# Altium PCB board.PcbDoc (part 1 of 2)
Units mm, origin at the board's own origin, x right, y up, seen from the top; angles counter-clockwise.
Board outline 96 x 40 mm, 4 copper layers (Top Layer, Mid Layer 1, Mid Layer 2, Bottom Layer), stack 1.57 mm thick; 216 components, 116 nets, 657 pads, 150 vias.
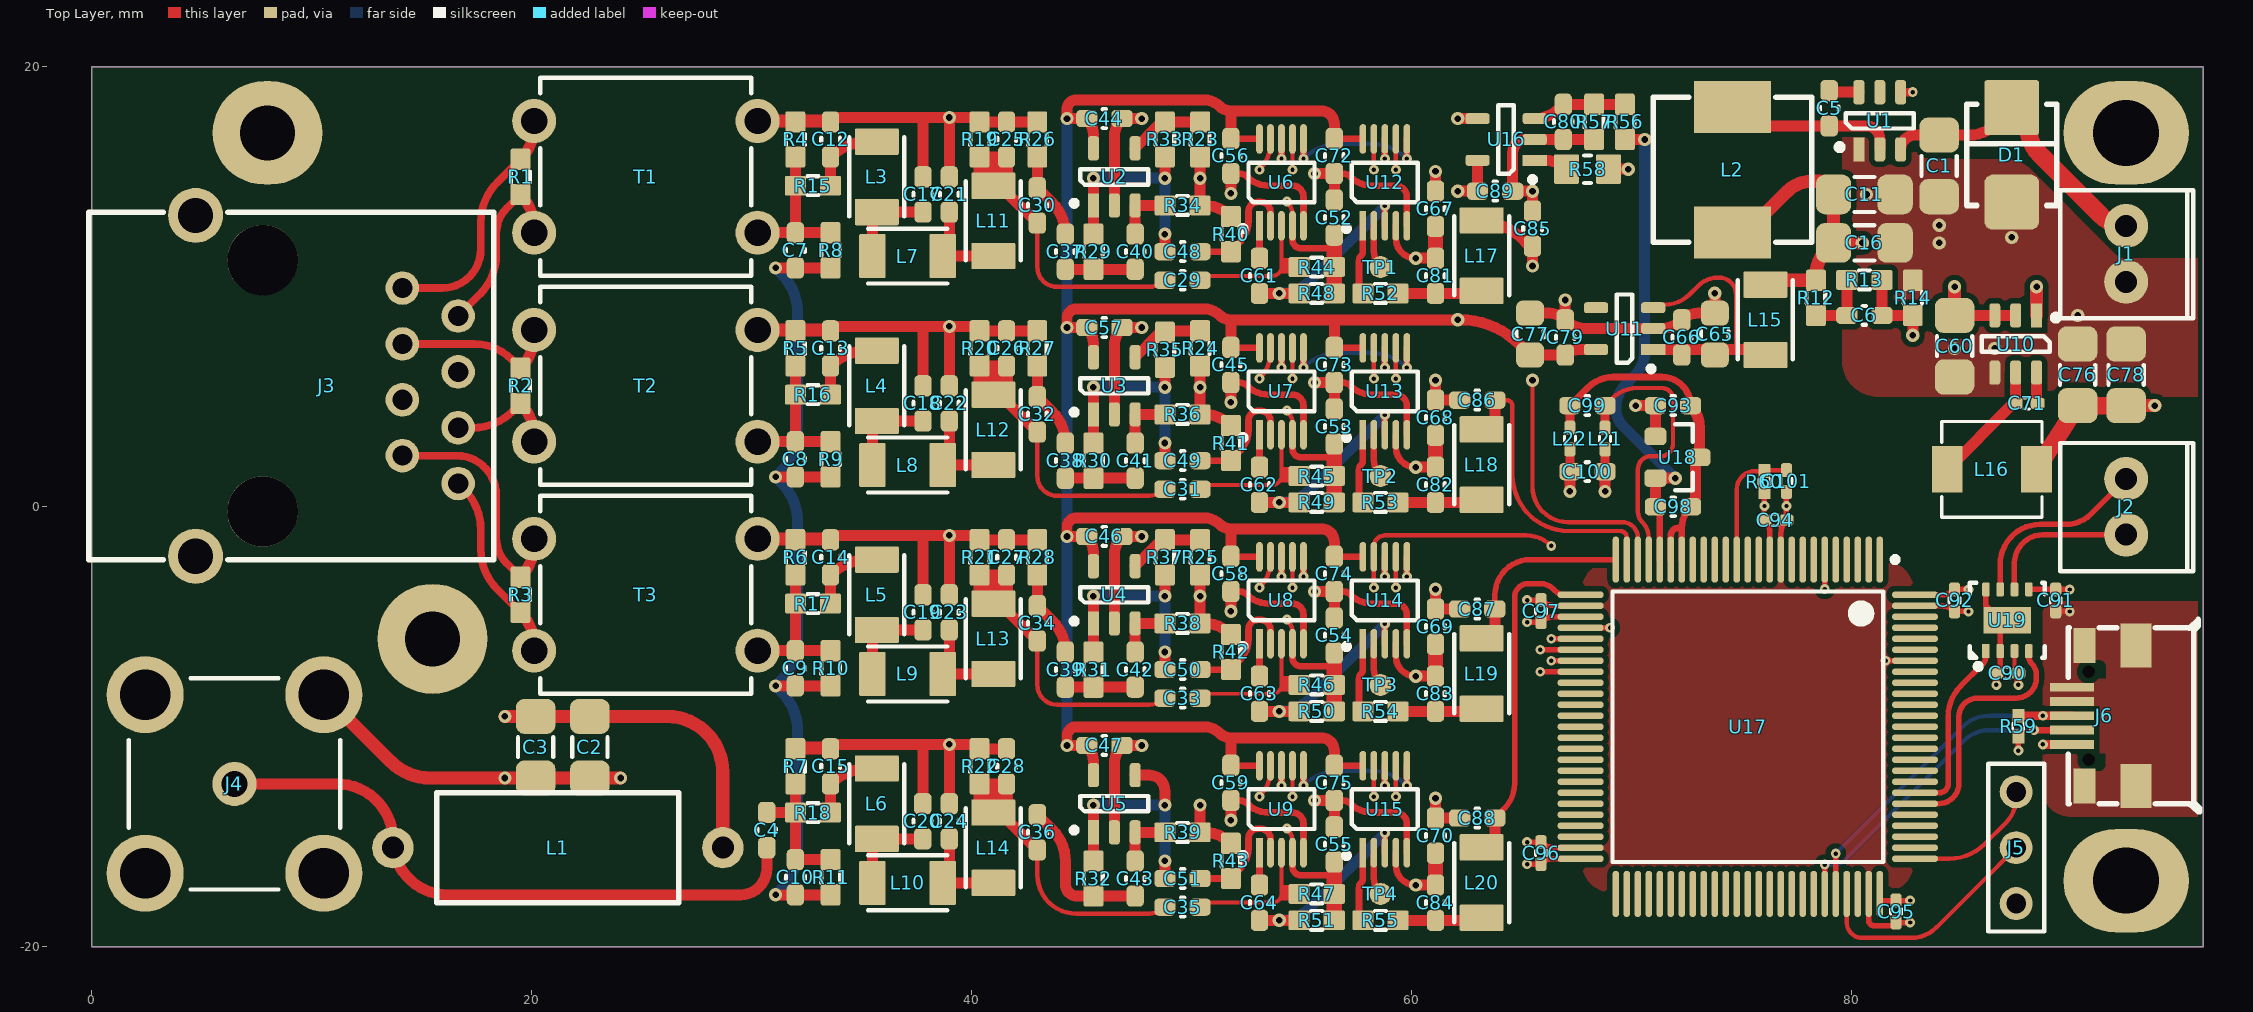
[diagram p0: Top Layer view]
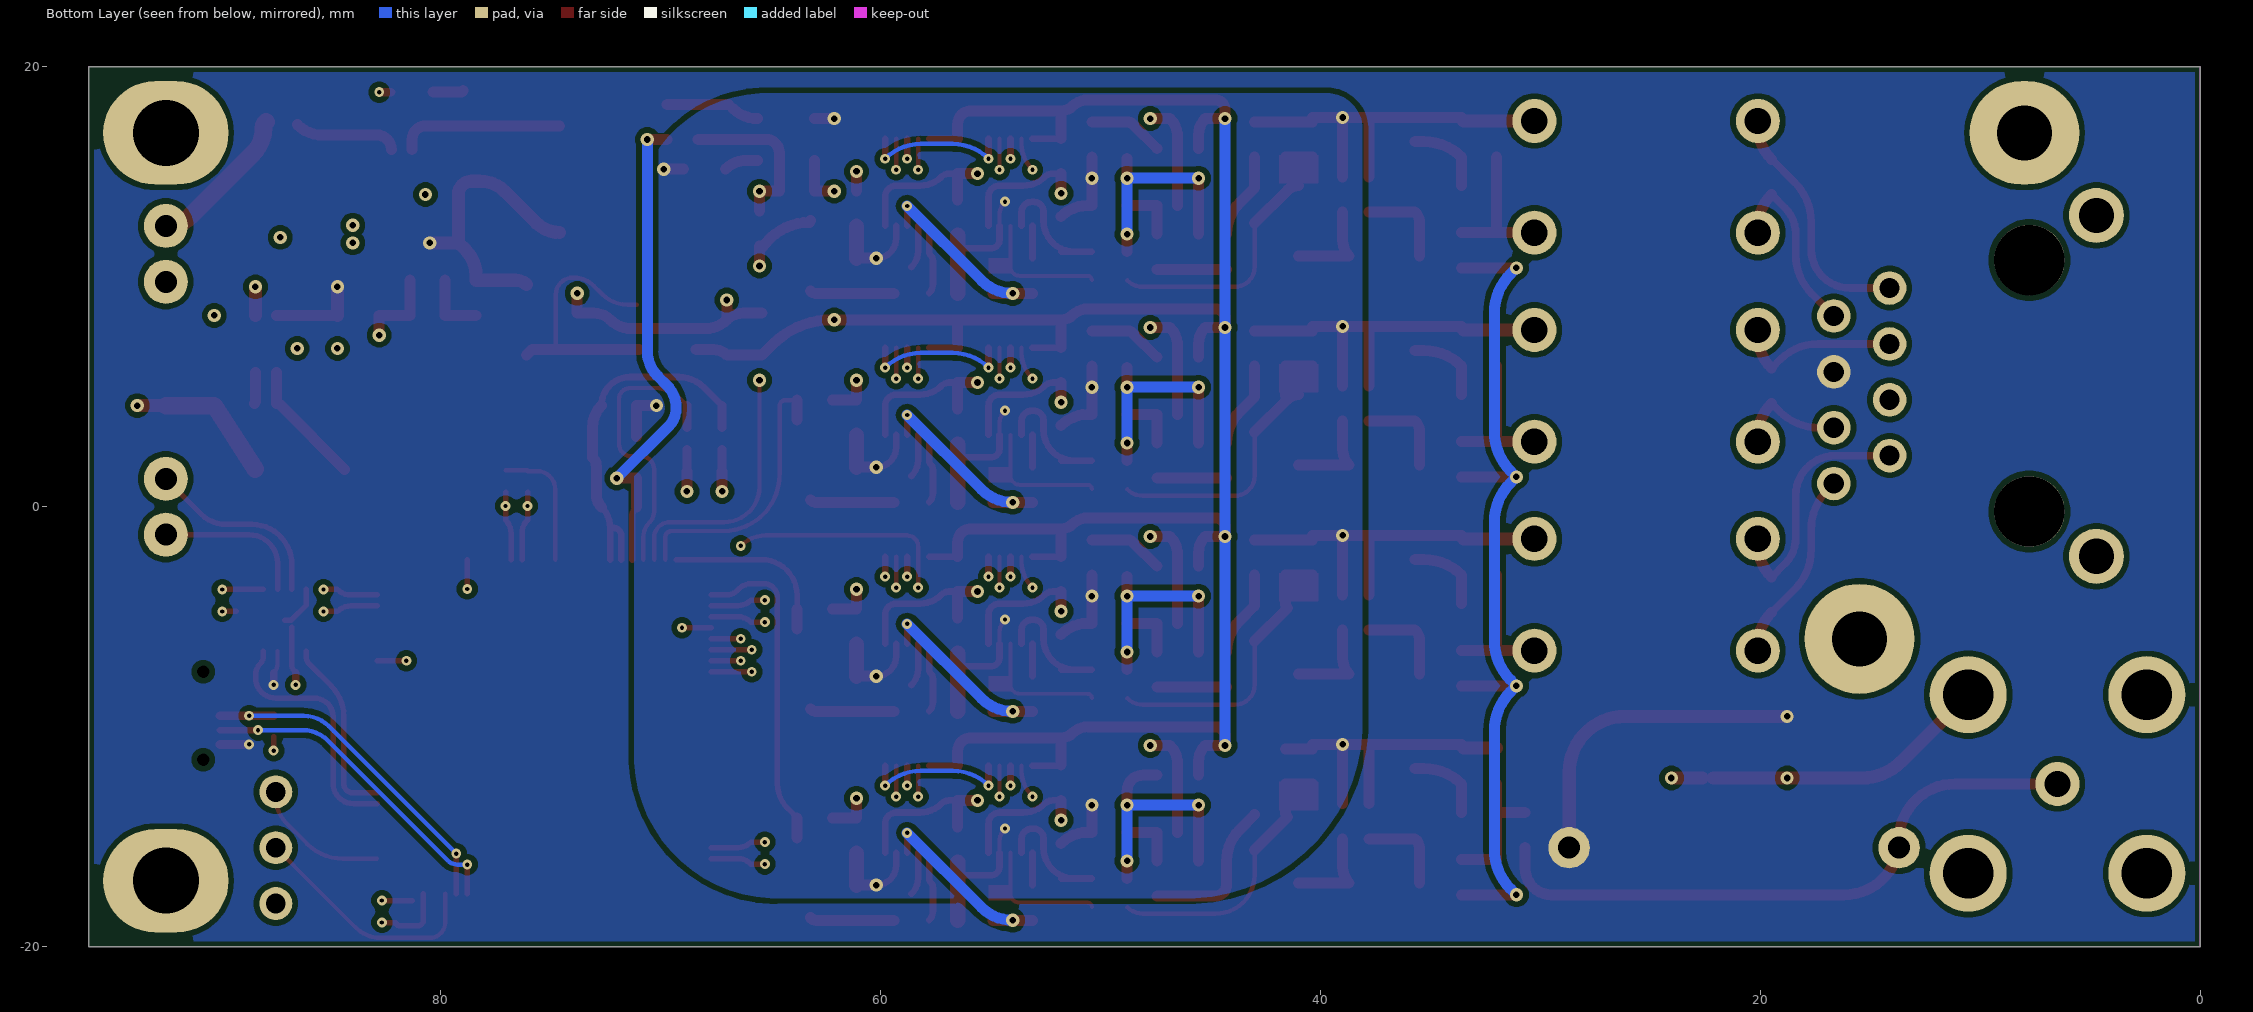
[diagram p1: Bottom Layer view, seen from below]
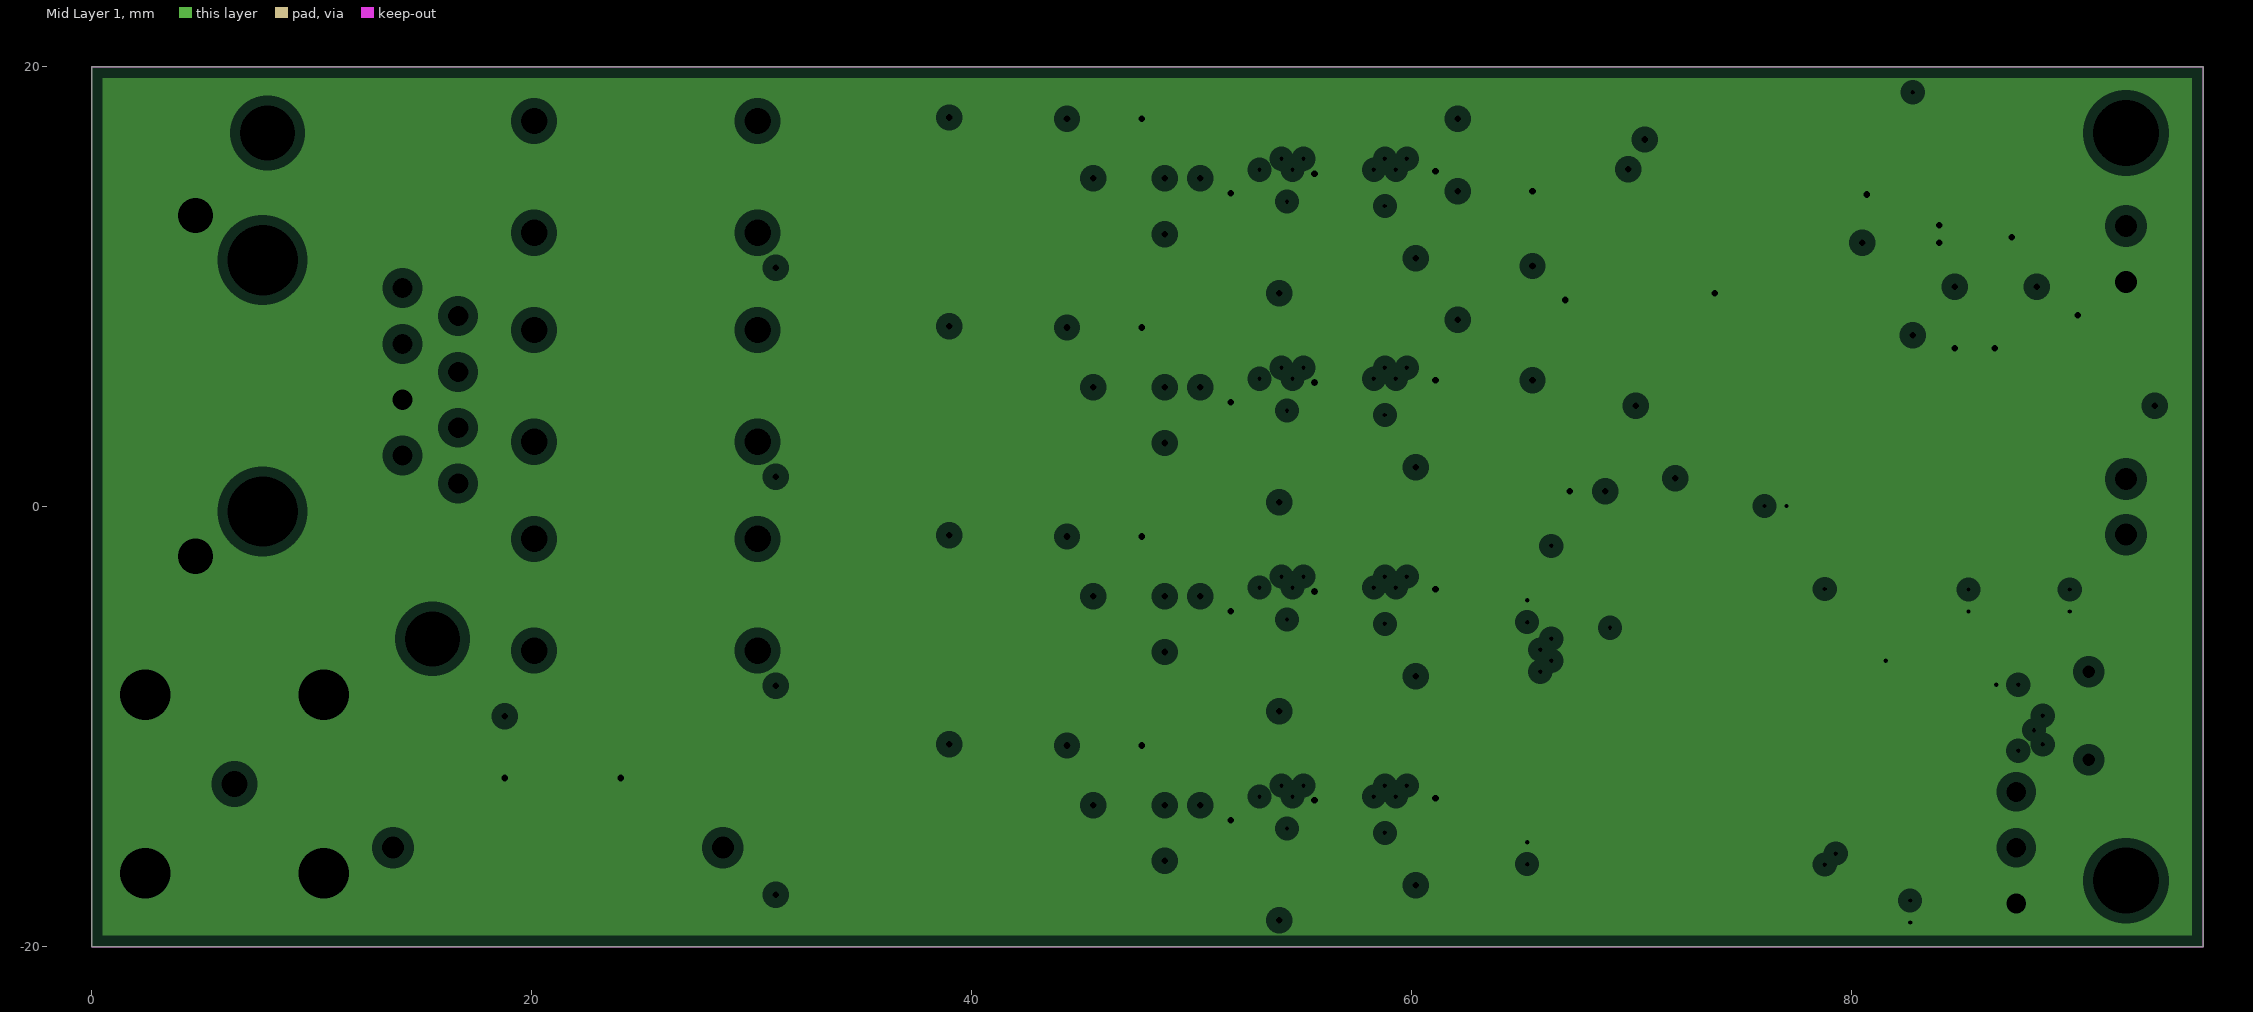
[diagram p2: Mid Layer 1, clearances drawn from the general rule]
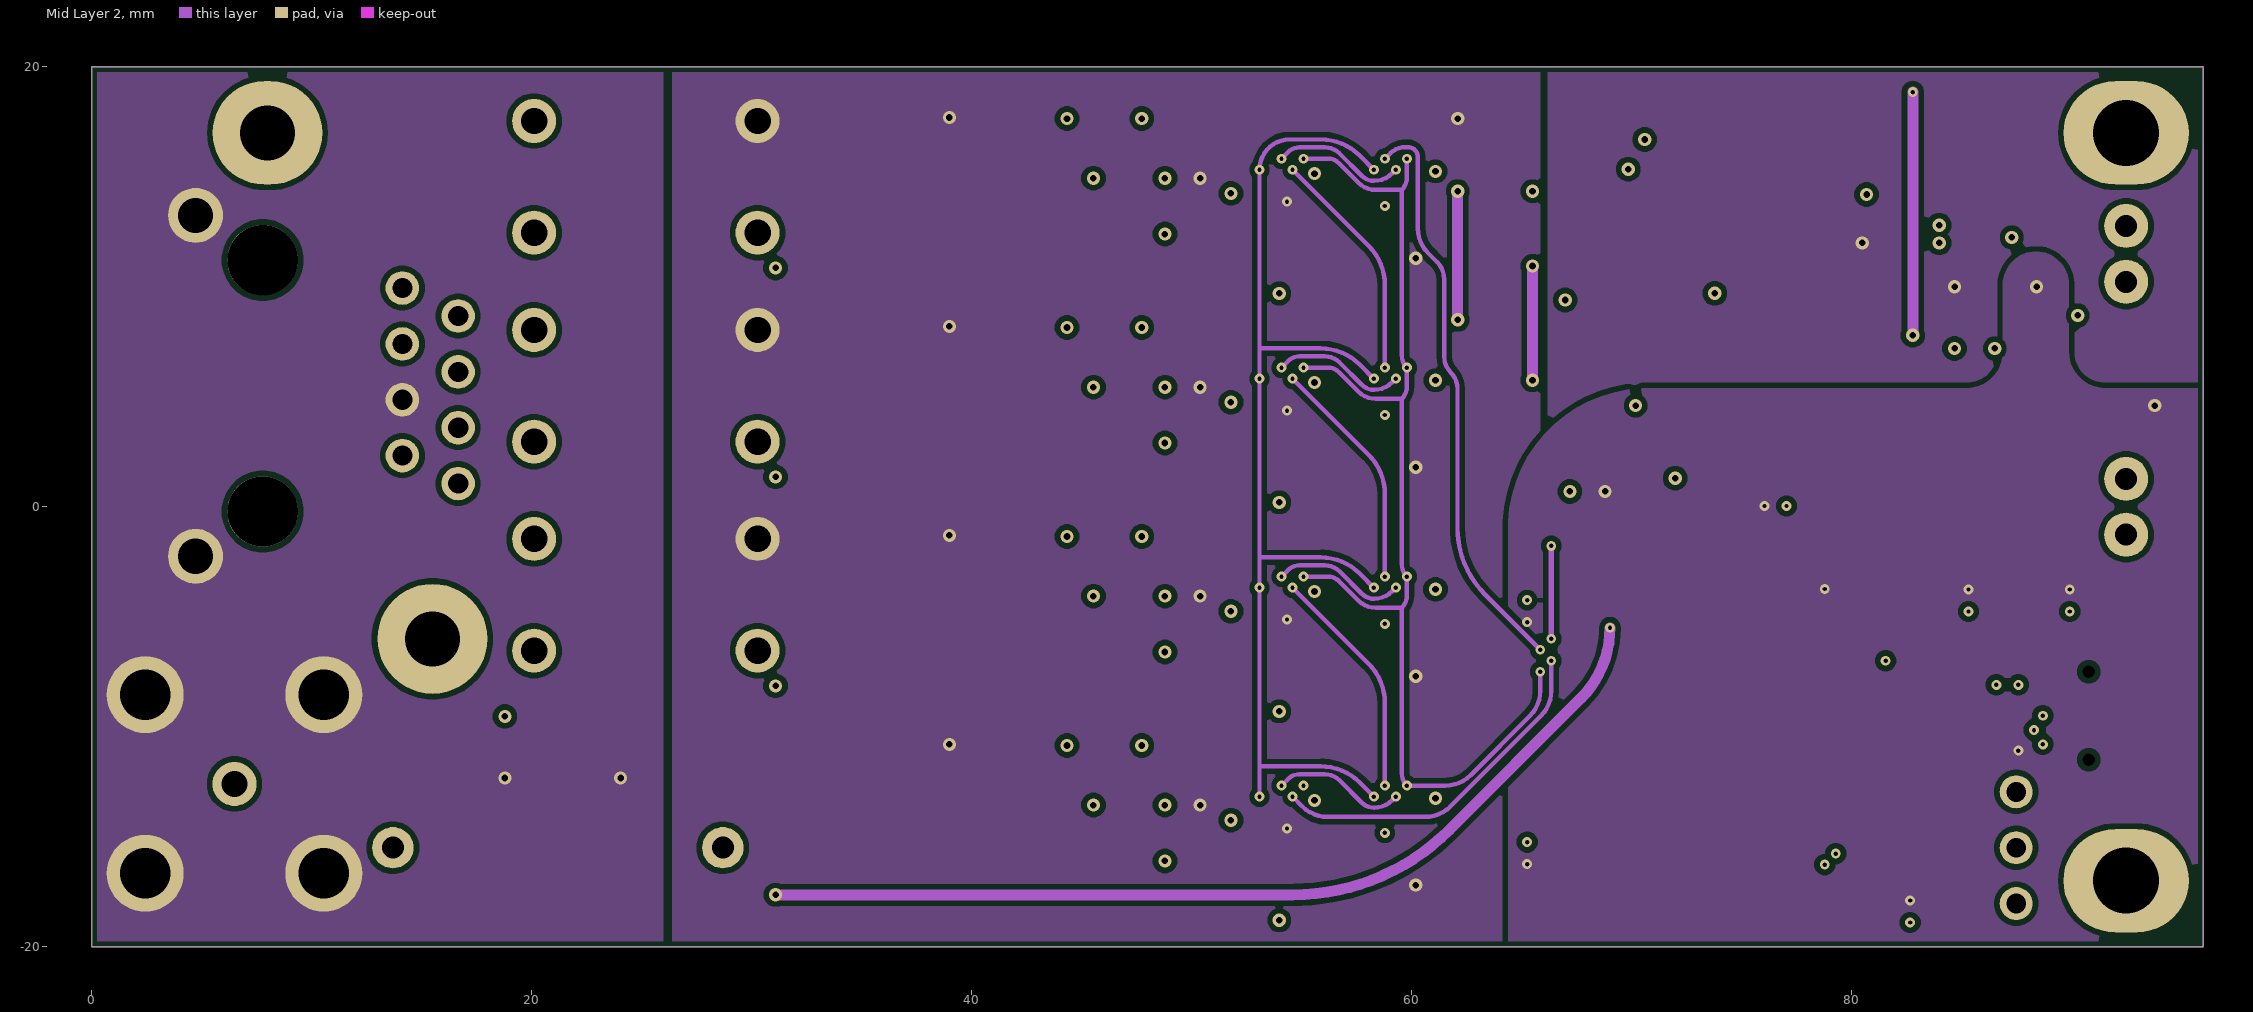
[diagram p3: Mid Layer 2]
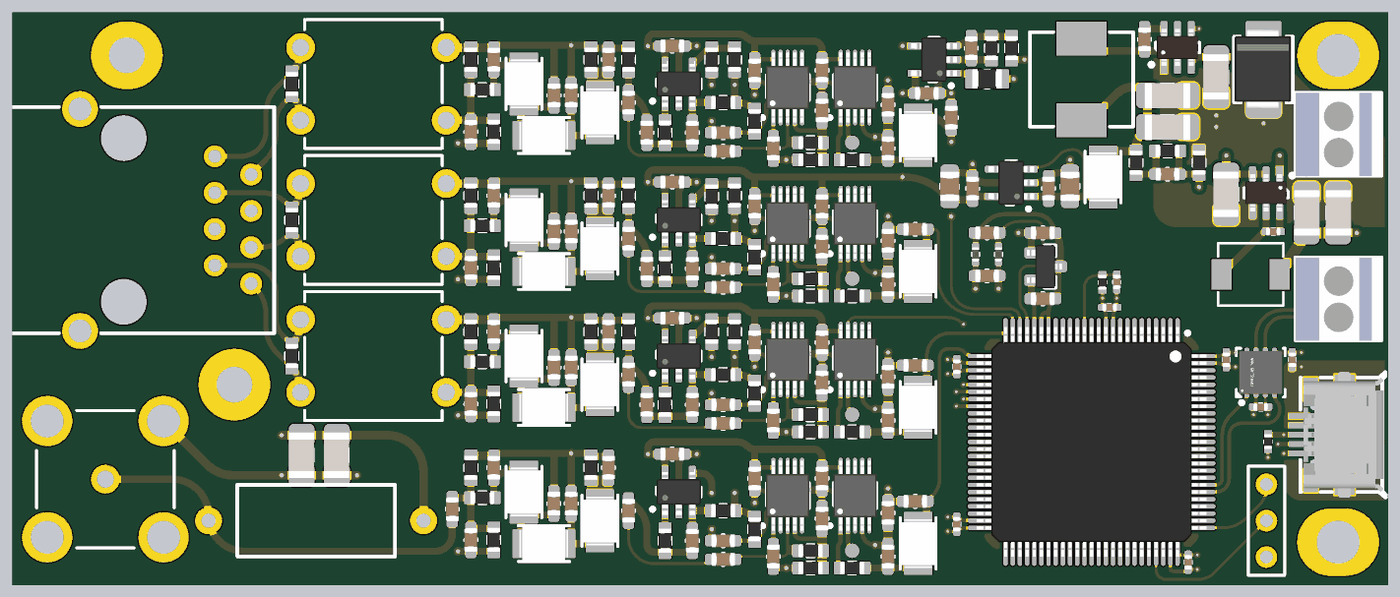
[diagram p5: 3D render of the assembled board from above, using the file's embedded part models]

## Layer stack, top to bottom
Top Solder: solder mask 0.0127, Solder Resist, Dk 3.8
Top Layer: signal copper 0.035
Dielectric 1: prepreg 0.1, 2313, Dk 4.05
Mid Layer 1: plane copper 0.0175, net GND
Core: core 1.265, FR-4, Dk 4.5
Mid Layer 2: signal copper 0.0175
Dielectric 2: prepreg 0.1, 2313, Dk 4.05
Bottom Layer: signal copper 0.035
Bottom Solder: solder mask 0.0127, Solder Resist, Dk 3.8

## Board outline
0,-20 96,-20 96,20 0,20

## Design rules (kind name [scope] priority, off if disabled: settings)
AcuteAngle [All] p1: minimum=6.00000000000000E+0001 checktracksonly=FALSE
Clearance Clearance_1 [InNetClass('220') vs InNetClass('220')] p1: gap=1.2 ignorepadtopadclearanceinfootprint=FALSE
Clearance [All] p2: gap=0.25 ignorepadtopadclearanceinfootprint=FALSE except(0.13: Arc-Arc Arc-Track Arc-SMDPad Arc-Via Track-Track Track-SMDPad Track-Via SMDPad-SMDPad SMDPad-Via THPad-Via Via-Via; 0.15: Arc-THPad Arc-Text Arc-Hole Track-THPad Track-Text Track-Hole SMDPad-THPad SMDPad-Text SMDPad-Hole THPad-THPad THPad-Text THPad-Hole Via-Text Via-Hole Fill-Text Fill-Hole Poly-Text Poly-Hole Region-Text Region-Hole Text-Text Text-Hole)
ComponentClearance ComponentClearance_1 [HasFootprint('CONN_DG308-2.54-2P') vs HasFootprint('CONN_DG308-2.54-2P')] p1: gap=-1 collisioncheckmode=3 verticalgap=2540 showdistances=FALSE
ComponentClearance ComponentClearance_3 [HasFootprint('HDR-1X3')] p2: gap=-1 collisioncheckmode=3 verticalgap=2540 showdistances=FALSE
ComponentClearance ComponentClearance_2 [HasFootprint('TP_TH_MICRO')] p3: gap=-1 collisioncheckmode=3 verticalgap=2540 showdistances=FALSE
ComponentClearance [All] p4: gap=0.3 collisioncheckmode=3 verticalgap=0.254 showdistances=FALSE
HoleSize [All] p1: absolutevalues=TRUE maxlimit=6 minlimit=0.2 maxpercent=80.000 minpercent=20.000
HoleToHoleClearance HoleToHoleClearance_1 [IsVia vs IsThruPin] p1: gap=0.7 allowstackedmicrovias=TRUE
HoleToHoleClearance [All] p2: gap=0.5 allowstackedmicrovias=TRUE
MinimumSolderMaskSliver [All] p1 off: minsoldermaskwidth=0.254
PlaneClearance [All] p1: clearance=0.45
PlaneConnect [All] p1: planeconnectstyle=Direct reliefexpansion=0.3 reliefentries=4 reliefconductorwidth=0.381 reliefairgap=0.178
PolygonConnect [All] p1: connectstyle=Direct reliefconductorwidth=0.381 reliefentries=4 polygonreliefangle="90 Angle" airgapwidth=0.356
RoutingVias [All] p1: holewidth=0.3 width=0.6 viastyle="Through Hole" minholewidth=0.2 minwidth=0.45 maxholewidth=0.9 maxwidth=1.27
SilkToSilkClearance [All] p1 off: silktosilkclearance=0.254
SilkToSolderMaskClearance [IsPad] p1 off: minsilkscreentomaskgap=0.254 clearancetoexposedcopper=TRUE
SolderMaskExpansion [All] p1: expansion=0.102 istentingtop=FALSE
UnRoutedNet [All] p1: checkbadconnections=TRUE
Width [All] p1: maxlimit=3.81 minlimit=0.14 preferedwidth=0.254
21 further rules are at their usual default settings.

## Components (designator, comment, footprint, x,y, rotation, side; value= is the part's Value field where it differs from the comment)
C1 "10uF" C1206 84,15.5 r90 top
C2 "10uF" C1206 22.653,-10.928 r90 top
C3 "10uF" C1206 20.193,-10.928 r90 top
C4 "1u" C0603 30.7,-14.7 r270 top
C5 "100nF" C0603 79,18.117 r270 top
C6 "75pF" C0603 80.6,8.7 r180 top
C7 "4.7pF" C0603 32,11.66 r90 top
C8 "4.7pF" C0603 32,2.16 r90 top
C9 "4.7pF" C0603 32,-7.34 r90 top
C10 "4.7pF" C0603 32,-16.84 r90 top
C11 "10uF" C1206 80.6,14.2 r180 top
C12 "1n5" C0603 33.6,16.7 r270 top
C13 "1n5" C0603 33.6,7.2 r270 top
C14 "1n5" C0603 33.6,-2.3 r270 top
C15 "1n5" C0603 33.6,-11.8 r270 top
C16 "10uF" C1206 80.6,12 r180 top
C17 "6n8" C0603 37.8,14.2 r270 top
C18 "6n8" C0603 37.8,4.7 r270 top
C19 "6n8" C0603 37.8,-4.8 r270 top
C20 "6n8" C0603 37.79,-14.3 r270 top
C21 "12n" C0603 39,14.2 r270 top
C22 "12n" C0603 39,4.7 r270 top
C23 "12n" C0603 39,-4.8 r270 top
C24 "12n" C0603 39,-14.3 r270 top
C25 "22n" C0603 41.6,16.7 r270 top
C26 "22n" C0603 41.6,7.2 r270 top
C27 "22n" C0603 41.6,-2.3 r270 top
C28 "22n" C0603 41.6,-11.8 r270 top
C29 "2n2" C0603 49.6,10.3 r180 top
C30 "1n" C0603 43,13.7 r270 top
C31 "2n2" C0603 49.6,0.8 r180 top
C32 "1n" C0603 43,4.2 r270 top
C33 "2n2" C0603 49.6,-8.7 r180 top
C34 "1n" C0603 43,-5.3 r270 top
C35 "2n2" C0603 49.6,-18.2 r180 top
C36 "1n" C0603 43,-14.8 r270 top
C37 "1n" C0603 44.275,11.6 r90 top
C38 "1n" C0603 44.275,2.1 r90 top
C39 "1n" C0603 44.275,-7.4 r90 top
C40 "1n" C0603 47.45,11.6 r270 top
C41 "1n" C0603 47.45,2.1 r270 top
C42 "1n" C0603 47.45,-7.4 r270 top
C43 "1n" C0603 47.45,-16.9 r270 top
C44 "1uF" C0603 46.05,17.65 r180 top
C45 "1uF" C0603 51.8,6.45 r90 top
C46 "1uF" C0603 46.05,-1.35 r180 top
C47 "1uF" C0603 46.05,-10.85 r180 top
C48 "1u" C0603 49.6,11.6 r180 top
C49 "1u" C0603 49.6,2.1 r180 top
C50 "1u" C0603 49.6,-7.4 r180 top
C51 "1u" C0603 49.6,-16.9 r180 top
C52 "1u" C0603 56.5,13.15 r90 top
C53 "1u" C0603 56.5,3.65 r90 top
C54 "1u" C0603 56.5,-5.85 r90 top
C55 "1u" C0603 56.5,-15.35 r90 top
C56 "1uF" C0603 51.8,15.95 r90 top
C57 "1uF" C0603 46.05,8.15 r180 top
C58 "1uF" C0603 51.8,-3.05 r90 top
C59 "1uF" C0603 51.8,-12.55 r90 top
C60 "10uF" C1206 84.7,7.3 r90 top
C61 "1uF" C0603 53.1,10.5 r90 top
C62 "1uF" C0603 53.1,1 r90 top
C63 "1uF" C0603 53.1,-8.5 r90 top
C64 "1uF" C0603 53.1,-18 r90 top
C65 "10uF" C0805 73.8,7.853 r270 top
C66 "100nF" C0603 72.3,7.7 r270 top
C67 "1u" C0603 61.1,13.55 r90 top
C68 "1u" C0603 61.1,4.05 r90 top
C69 "1u" C0603 61.1,-5.45 r90 top
C70 "1u" C0603 61.1,-14.95 r90 top
C71 "100nF" C0402 87.978,4.7 r180 top
C72 "1uF" C0603 56.5,15.95 r90 top
C73 "1uF" C0603 56.5,6.45 r90 top
C74 "1uF" C0603 56.5,-3.05 r90 top
C75 "1uF" C0603 56.5,-12.55 r90 top
C76 "10uF" C1206 90.3,6 r270 top
C77 "10uF" C0805 65.4,7.852 r270 top
C78 "10uF" C1206 92.5,6 r270 top
C79 "100nF" C0603 67,7.7 r270 top
C80 "1u" C0603 66.912,17.5 r270 top
C81 "750p" C0603 61.1,10.5 r90 top
C82 "750p" C0603 61.1,1 r90 top
C83 "750p" C0603 61.1,-8.5 r90 top
C84 "750p" C0603 61.1,-18 r90 top
C85 "3n3" C0603 65.512,12.65 r90 top
C86 "3n3" C0603 63,4.85 r180 top
C87 "3n3" C0603 63,-4.65 r180 top
C88 "3n3" C0603 63,-14.15 r180 top
C89 "100nF" C0603 63.812,14.35 r180 top
C90 "100nF" C0402 87.1,-7.558 r0 top
C91 "100nF" C0402 89.3,-4.258 r90 top
C92 "100nF" C0402 84.699,-4.258 r90 top
C93 "100nF" C0603 71.9,4.6 r180 top
C94 "100nF" C0402 76.558,-0.601 r180 top
C95 "100nF" C0402 82.042,-18.4 r90 top
C96 "100nF" C0402 65.901,-15.742 r270 top
C97 "100nF" C0402 65.9,-4.742 r270 top
C98 "100nF" C0603 71.9,0 r180 top
C99 "1uF" C0603 68.011,4.6 r0 top
C100 "1uF" C0603 68.011,1.6 r0 top
C101 "100nF" C0402 77.058,1.169 r90 top
D1 "24V" SMB 87.3,16 r90 top
J1 "24V" CONN_DG308-2.54-2P 92.5,11.5 r90 top
J2 "CAN" CONN_DG308-2.54-2P 92.5,0 r90 top
J3 "R-RJ45R10P-B000" RJ45-TH_R-RJ45R10P-B000 10.7,5.5 r90 top
J4 "E-IN" CONN_F_TYPE 6.5,-12.6 r0 top
J5 "SWD" HDR-1X3 87.5,-15.5 r0 top
J6 "MICROQTJ" MICRO-USB-SMD_MICROQTJ 91.5,-9.5 r90 top
L1 "3.3mH" IND-TH_BD5.0-L10.5-P14.50-D0.6 21.2,-15.5 r180 top
L2 "10UH" IND-SMD_L7.2-W6.6_GPSR07X0 74.6,15.323 r270 top
L3 "330uH" L1210 35.7,15 r270 top
L4 "330uH" L1210 35.7,5.5 r270 top
L5 "330uH" L1210 35.7,-4 r270 top
L6 "330uH" L1210 35.7,-13.5 r270 top
L7 "680uH" L1210 37.1,11.4 r0 top
L8 "680uH" L1210 37.1,1.9 r0 top
L9 "680uH" L1210 37.1,-7.6 r0 top
L10 "680uH" L1210 37.1,-17.1 r0 top
L11 "1mH" L1210 41,13 r90 top
L12 "1mH" L1210 41,3.5 r90 top
L13 "1mH" L1210 41,-6 r90 top
L14 "1mH" L1210 41,-15.5 r90 top
L15 "1mH" L1210 76.1,8.5 r270 top
L16 "4.7uH" IND-SMD_L4.4-W4.2 86.4,1.7 r180 top
L17 "22uH" L1210 63.2,11.417 r90 top
L18 "22uH" L1210 63.2,1.917 r90 top
L19 "22uH" L1210 63.2,-7.583 r90 top
L20 "22uH" L1210 63.2,-17.083 r90 top
L21 "BEAD" L0402 68.811,3.1 r90 top
L22 "BEAD" L0402 67.211,3.1 r90 top
R1 "160" R0603 19.5,15 r90 top
R2 "160" R0603 19.5,5.5 r90 top
R3 "160" R0603 19.5,-4 r90 top
R4 "330" R0603 32,16.7 r270 top
R5 "330" R0603 32,7.2 r270 top
R6 "330" R0603 32,-2.3 r270 top
R7 "330" R0603 32,-11.8 r270 top
R8 "47k" R0603 33.6,11.66 r90 top
R9 "47k" R0603 33.6,2.16 r90 top
R10 "47k" R0603 33.6,-7.34 r90 top
R11 "47k" R0603 33.6,-16.84 r90 top
R12 "49.9R" R0603 78.4,9.5 r270 top
R13 "100k" R0603 80.6,10.312 r0 top
R14 "13k5" R0603 82.8,9.5 r90 top
R15 "270" R0603 32.8,14.6 r180 top
R16 "270" R0603 32.8,5.1 r180 top
R17 "270" R0603 32.8,-4.4 r180 top
R18 "270" R0603 32.8,-13.9 r180 top
R19 "2k2" R0603 40.375,16.7 r270 top
R20 "2k2" R0603 40.375,7.2 r270 top
R21 "2k2" R0603 40.375,-2.3 r270 top
R22 "2k2" R0603 40.375,-11.8 r270 top
R23 "10k" R0603 50.4,16.7 r270 top
R24 "10k" R0603 50.4,7.2 r270 top
R25 "10k" R0603 50.4,-2.3 r270 top
R26 "51k" R0603 43,16.7 r270 top
R27 "51k" R0603 43,7.2 r270 top
R28 "51k" R0603 43,-2.3 r270 top
R29 "200k" R0603 45.55,11.6 r270 top
R30 "200k" R0603 45.55,2.1 r270 top
R31 "200k" R0603 45.55,-7.4 r270 top
R32 "68k" R0603 45.55,-16.9 r270 top
R33 "30k" R0603 48.8,16.7 r90 top
R34 "100k" R0603 49.6,13.7 r180 top
R35 "30k" R0603 48.8,7.139 r90 top
R36 "100k" R0603 49.6,4.2 r180 top
R37 "30k" R0603 48.8,-2.3 r90 top
R38 "100k" R0603 49.6,-5.3 r180 top
R39 "150k" R0603 49.6,-14.8 r180 top
R40 "10k" R0603 51.8,12.4 r270 top
R41 "10k" R0603 51.8,2.9 r270 top
R42 "10k" R0603 51.8,-6.6 r270 top
R43 "10k" R0603 51.8,-16.1 r270 top
R44 "22k" R0603 55.7,10.9 r180 top
R45 "22k" R0603 55.7,1.4 r180 top
R46 "22k" R0603 55.7,-8.1 r180 top
R47 "22k" R0603 55.7,-17.6 r180 top
R48 "10k" R0603 55.7,9.7 r180 top
R49 "10k" R0603 55.7,0.2 r180 top
R50 "10k" R0603 55.7,-9.3 r180 top
R51 "10k" R0603 55.7,-18.8 r180 top
R52 "100" R0603 58.6,9.7 r180 top
R53 "100" R0603 58.6,0.2 r180 top
R54 "100" R0603 58.6,-9.3 r180 top
R55 "100" R0603 58.6,-18.8 r180 top
R56 "1M" R0603 69.712,17.5 r270 top
R57 "1M" R0603 68.312,17.5 r90 top
R58 "10" R0805 68.012,15.35 r180 top
R59 "1k5" R0402 87.6,-9.976 r90 top
R60 "4k7" R0402 76.058,1.145 r90 top
T1 "DA103C" TR_DA103C 25.2,15 r0 top
T2 "DA103C" TR_DA103C 25.2,5.5 r0 top
T3 "DA103C" TR_DA103C 25.2,-4 r0 top
TP1 "" TP_TH_MICRO 58.6,10.9 r90 top
TP2 "" TP_TH_MICRO 58.6,1.4 r90 top
TP3 "" TP_TH_MICRO 58.6,-8.1 r90 top
TP4 "" TP_TH_MICRO 58.6,-17.6 r90 top
U1 "TPS54302" SOT-23-6 81.3,17.55 r0 top
U2 "ADA4891" SOT-23-5 46.5,15 r270 top
U3 "ADA4891" SOT-23-5 46.5,5.5 r270 top
U4 "ADA4891" SOT-23-5 46.5,-4 r270 top
U5 "ADA4891" SOT-23-5 46.5,-13.5 r270 top
U6 "MCP6S93" MSOP10 54.1,14.75 r0 top
U7 "MCP6S93" MSOP10 54.1,5.25 r0 top
U8 "MCP6S93" MSOP10 54.1,-4.25 r0 top
U9 "MCP6S93" MSOP10 54.1,-13.75 r0 top
U10 "AP63203WU-7" SOT-23-6 87.478,7.4 r180 top
U11 "TLV70033DDCR" SOT-23-5 69.7,8.1 r0 top
U12 "MCP6S93" MSOP10 58.8,14.75 r0 top
U13 "MCP6S93" MSOP10 58.8,5.25 r0 top
U14 "MCP6S93" MSOP10 58.8,-4.25 r0 top
U15 "MCP6S93" MSOP10 58.8,-13.75 r0 top
U16 "ADA4891" SOT-23-5 64.312,16.7 r0 top
U17 "STM32F103VCT6" LQFP-100 75.3,-10 r270 top
U18 "NCP51460SN33T1G" SOT-23 72.1,2.25 r180 top
U19 "SIT1042QTK/3" DFN8_3X3_P065 87.1,-5.158 r90 top

## Footprints (in the part's own frame and the unit in brackets; to place one, negate y for a bottom-side part, rotate by r counter-clockwise, add the part's x,y. Pads: shape width x height; smd on the part's side, far side on the other; paste and mask are expansions set on the pad)
C0402 [mm] "Chip Capacitor Body"
  rrect50% 0.635x0.508 smd mask+0.05: 1(-0.5,0) 2(0.5,0)
  silkscreen extent -0.13,-0.25 0.13,0.25, body extent -0.52,-0.27 0.53,0.28, height 0.55
C0603 [mil] "Chip Capacitor"
  rrect50% 38x31 smd mask+1.97: 1(-31.5,0) 2(31.5,0)
  silkscreen extent -3,-17 3,17, body extent -33,-18 33,18, height 35
C0805 [mil] "Chip Capacitor"
  rrect50% 45x50 smd mask+1.97: 1(-37.5,0) 2(37.5,0)
  silkscreen extent -6,-25 6,25, body extent -41,-27 41,27, height 53
C1206 [mm] "Chip Capacitor"
  rrect50% 1.6x1.8 smd: 1(-1.4,0) 2(1.4,0)
  silkscreen extent -0.45,-0.8 0.45,0.8, body extent -1.6,-0.88 1.6,0.92, height 1.6
CONN_DG308-2.54-2P [mm]
  round 2 hole 1 mask+0: 1(1.27,0) 2(-1.27,0)
  silkscreen extent -2.92,-3.05 2.9,3, body extent -2.92,-3.05 2.88,2.97, height 7.83
CONN_F_TYPE [mm]
  round 2 hole 1.2: 1(0,0)
  round 3.5 hole 2.3: 2(-4.06,-4.06) 2(-4.06,4.06) 2(4.06,-4.06) 2(4.06,4.06)
  silkscreen extent -4.8,-4.8 4.8,4.8, body extent -21.45,-4.76 4.75,4.76, height 17.9
DFN8_3X3_P065 [mm]
  rect 0.65x0.35 smd mask+0.05: 1(-1.4,0.975)
  rrect50% 0.65x0.35 smd mask+0.05: 2(-1.4,0.325) 3(-1.4,-0.325) 4(-1.4,-0.975) 5(1.4,-0.975) 6(1.4,-0.325) 7(1.4,0.325) 8(1.4,0.975)
  rect 1.2x2.15 smd mask+0.05: 9(0,0)
  silkscreen extent -2.22,-1.7 1.7,1.7, body extent -1.51,-1.5 1.51,1.5, height 0.8
HDR-1X3 [mm]
  round 1.5 hole 0.9: 1(0,2.54) 2(0,0) 3(0,-2.54)
  silkscreen extent -1.27,-3.81 1.27,3.81
IND-SMD_L4.4-W4.2 [mm]
  rect 1.4x2.12 smd: 1(2.028,0) 2(-2.028,0)
  silkscreen extent -2.28,-2.18 2.28,2.18, body extent -2.28,-2.18 2.28,2.18, height 1.8
IND-SMD_L7.2-W6.6_GPSR07X0 [mm]
  rect 2.35x3.5 smd: 1(-2.85,0) 2(2.85,0)
  silkscreen extent -3.3,-3.6 3.3,3.6, body extent -3.3,-3.6 3.3,3.6, height 3
IND-TH_BD5.0-L10.5-P14.50-D0.6 [mil]
  round 74 hole 39.37: 1(-295.28,0) 2(295.28,0)
  silkscreen extent -217,-98 217,98, body extent -217,-98 217,98, height 216
L0402 [mm] "Chip Inductor"
  rrect50% 0.635x0.508 smd mask+0.05: 1(-0.5,0) 2(0.5,0)
  silkscreen extent -0.13,-0.25 0.13,0.25, body extent -0.5,-0.25 0.5,0.25, height 0.5
L1210 [mm] "Chip Inductor"
  rrect10% 1.2x2 smd mask+0.05: 1(-1.6,0) 2(1.6,0)
  silkscreen extent -1.8,-1.25 1.8,1.25, body extent -1.71,-1.25 1.69,1.25, height 2.2
LQFP-100 [mm] "Thin QFP, 100-Leads, Body 14x14mm, Pitch 0.5mm, IPC Low Density"
  oval 2.1x0.3 smd: 1(-7.6,6) 2(-7.6,5.5) 3(-7.6,5) 4(-7.6,4.5) 5(-7.6,4) 6(-7.6,3.5) 7(-7.6,3) 8(-7.6,2.5) 9(-7.6,2) 10(-7.6,1.5) 11(-7.6,1) 12(-7.6,0.5) 13(-7.6,0) 14(-7.6,-0.5) 15(-7.6,-1) 16(-7.6,-1.5) 17(-7.6,-2) 18(-7.6,-2.5) 19(-7.6,-3) 20(-7.6,-3.5) 21(-7.6,-4) 22(-7.6,-4.5) 23(-7.6,-5) 24(-7.6,-5.5) 25(-7.6,-6) 51(7.6,-6) 52(7.6,-5.5) 53(7.6,-5) 54(7.6,-4.5) 55(7.6,-4) 56(7.6,-3.5) 57(7.6,-3) 58(7.6,-2.5) 59(7.6,-2) 60(7.6,-1.5) 61(7.6,-1) 62(7.6,-0.5) 63(7.6,0) 64(7.6,0.5) 65(7.6,1) 66(7.6,1.5) 67(7.6,2) 68(7.6,2.5) 69(7.6,3) 70(7.6,3.5) 71(7.6,4) 72(7.6,4.5) 73(7.6,5) 74(7.6,5.5) 75(7.6,6)
  oval 0.3x2.1 smd: 26(-6,-7.6) 27(-5.5,-7.6) 28(-5,-7.6) 29(-4.5,-7.6) 30(-4,-7.6) 31(-3.5,-7.6) 32(-3,-7.6) 33(-2.5,-7.6) 34(-2,-7.6) 35(-1.5,-7.6) 36(-1,-7.6) 37(-0.5,-7.6) 38(0,-7.6) 39(0.5,-7.6) 40(1,-7.6) 41(1.5,-7.6) 42(2,-7.6) 43(2.5,-7.6) 44(3,-7.6) 45(3.5,-7.6) 46(4,-7.6) 47(4.5,-7.6) 48(5,-7.6) 49(5.5,-7.6) 50(6,-7.6) 76(6,7.6) 77(5.5,7.6) 78(5,7.6) 79(4.5,7.6) 80(4,7.6) 81(3.5,7.6) 82(3,7.6) 83(2.5,7.6) 84(2,7.6) 85(1.5,7.6) 86(1,7.6) 87(0.5,7.6) 88(0,7.6) 89(-0.5,7.6) 90(-1,7.6) 91(-1.5,7.6) 92(-2,7.6) 93(-2.5,7.6) 94(-3,7.6) 95(-3.5,7.6) 96(-4,7.6) 97(-4.5,7.6) 98(-5,7.6) 99(-5.5,7.6) 100(-6,7.6)
  silkscreen extent -7.72,-6.15 6.15,6.83, body extent -8.01,-8.01 8.01,8.01, height 1.55
MICRO-USB-SMD_MICROQTJ [mm]
  rect 0.4x2 smd mask+0.05: 1(-1.3,1.452) 2(-0.65,1.452) 3(0,1.452) 4(0.65,1.452) 5(1.3,1.452)
  rect 1.6x1 smd: 6(-3.2,0.902) 9(3.2,0.902)
  rect 2x1.4 smd: 7(-3.2,-1.452) 8(3.2,-1.452)
  round 0 hole 0.55 unplated: ""(-2,0.698) ""(2,0.698)
  silkscreen extent -4.37,-4.34 4.38,1.63, body extent -4.4,-4.2 4.4,1.4, height 2.72
MSOP10 [mm] "MSOP, 8-Leads"
  rect 0.3x1.35 smd mask+0.05: 1(-1,-1.975)
  oval 0.3x1.35 smd mask+0.05: 2(-0.5,-1.975) 3(0,-1.975) 4(0.5,-1.975) 5(1,-1.975) 6(1,1.975) 7(0.5,1.975) 8(0,1.975) 9(-0.5,1.975) 10(-1,1.975)
  silkscreen extent -1.87,-2.23 1.5,0.9, body extent -1.5,-2.45 1.5,2.45, height 1
R0402 [mm]
  rrect10% 0.635x0.55 smd mask+0.05: 1(-0.476,0) 2(0.476,0)
  silkscreen extent -0.12,-0.25 0.13,0.25, body extent -0.52,-0.27 0.53,0.28, height 0.4
R0603 [mil] "Chip Resistor; Body 1.6 x 0.8 mm (LxW typ)"
  rrect20% 38x35.43 smd mask+1.97: 1(-31.5,0) 2(31.5,0)
  silkscreen extent -10,-17 10,17, body extent -33,-18 33,18, height 22
R0805 [mil] "Chip Resistor; Body 1.6 x 0.8 mm (LxW typ)"
  rrect15% 45x53.15 smd: 1(-37.5,0) 2(37.5,0)
  silkscreen extent -6,-25 6,25, body extent -41,-27 41,27, height 24
RJ45-TH_R-RJ45R10P-B000 [mm]
  round 1.524 hole 0.914: 1(4.445,-3.43) 2(3.175,-5.97) 3(1.905,-3.43) 4(0.635,-5.97) 5(-0.635,-3.43) 6(-1.905,-5.97) 7(-3.175,-3.43) 8(-4.445,-5.97)
  round 2.5 hole 1.6: 9(7.75,5.97) 10(-7.75,5.97)
  round 3.2 hole 3.2 unplated: ""(-5.715,2.92) ""(5.715,2.92)
  silkscreen extent -7.9,-7.58 7.9,10.82
SMB [mm]
  rrect30% 2.5x2.5 smd mask+0.05: 1(-2.15,0)
  rrect10% 2.5x2.5 smd mask+0.05: 2(2.15,0)
  silkscreen extent -2.3,-2.05 2.3,2.05, body extent -2.75,-1.93 2.85,2.03, height 2.65
SOT-23 [mm]
  rrect50% 1x0.8 smd mask+0.05: 1(1,-0.95) 2(1,0.95) 3(-1,0)
  silkscreen extent -0.7,-1.5 0.1,1.5, body extent -1.27,-1.5 1.33,1.5, height 1.1
SOT-23-5 [mm]
  rect 1.1x0.5 smd mask+0.05: 1(1.3,-0.95)
  rrect50% 1.1x0.5 smd mask+0.05: 2(1.3,0) 3(1.3,0.95) 4(-1.3,0.95) 5(-1.3,-0.95)
  silkscreen extent -0.35,-1.95 1.32,1.55, body extent -1.6,-1.55 1.6,1.55, height 1.45
SOT-23-6 [mm]
  rect 0.5x1.1 smd mask+0.05: 1(-0.95,-1.3)
  rrect50% 0.5x1.1 smd mask+0.05: 2(0,-1.3) 3(0.95,-1.3) 4(0.95,1.3) 5(0,1.3) 6(-0.95,1.3)
  silkscreen extent -1.95,-1.32 1.55,0.35, body extent -1.45,-1.3 1.45,1.3, height 1.14
TP_TH_MICRO [mm] "TP30_SMD"
  round 1 smd mask+0.05: 1(0,0)
TR_DA103C [mm]
  round 2 hole 1.2: 1(-5.08,2.54) 3(-5.08,-2.54) 4(5.08,-2.54) 6(5.08,2.54)
  silkscreen extent -4.8,-4.5 4.8,4.5, body extent -4.76,-4.5 4.76,4.5, height 6.35

## Part data
C1 C2 C3 C11 C16 C60 C65 C76 C77 C78: library part CAP, "10uf 50V 1206"
C4 C44 C45 C46 C47 C48 C49 C50 C51 C52 C53 C54 C55 C56 C57 C58 C59 C61 C62 C63 C64 C67 C68 C69 C70 C72 C73 C74 C75 C80 C99 C100: library part CAP, "1u 0603"
C5 C66 C79 C89 C93 C98: library part CAP, "100nF 0603"
C6: library part CAP, "75pF 0603"
C7 C8 C9 C10: library part CAP, "4.7pF 0603"
C12 C13 C14 C15: library part CAP, "1n5 0603"
C17 C18 C19 C20: library part CAP, "6n8 0603"
C21 C22 C23 C24: library part CAP, "12nF 0603"
C25 C26 C27 C28: library part CAP, "22nF 0603"
C29 C31 C33 C35: library part CAP, "2n2 0603"
C30 C32 C34 C36 C37 C38 C39 C40 C41 C42 C43: library part CAP, "1n 0603"
C71 C90 C91 C92 C94 C95 C96 C97 C101: library part CAP, "100nF 0402"
C81 C82 C83 C84: library part CAP, "750pF 0603"
C85 C86 C87 C88: library part CAP, "3n3 0603"
D1: library part SMCJ54A, "P6SMB24A"
J1 J2: library part "CONN MOLEX HDR-M 1x4", "DG308-2.54-02P-14-00A(H)"
J4: library part "CONN MOLEX HDR-M 1x4", "-"
J5: library part "Header 3"
J6: "MicroQTJ"
L1: library part SRN3015-4R7M, "CKL0510*3.3mH/K-A T"
L2: library part SRN3015-100M, "CYA0630-10UH"
L3 L4 L5 L6: library part SRN3015-4R7M, "NLCV32T-331K-PF"
L7 L8 L9 L10: library part SRN3015-4R7M, "LQH32CN561K23L"
L11 L12 L13 L14 L15: library part SRN3015-4R7M, "NLFV32T-102K-EF"
L16: "FXL0420-4R7-M"
L17 L18 L19 L20: library part SRN3015-4R7M, "NLCV32T-220K-PF"
L21 L22: library part BLM18AG601SN1D, "BEAD 0402"
R1 R2 R3: library part R0201, "160R 0603"
R4 R5 R6 R7: library part R0201, "330R 0603"
R8 R9 R10 R11: library part R0201, "47k 0603"
R12: library part R0201, "49R9 0603"
R13: library part RES, "100k 0603"
R14: library part RES, "13k7 0603"
R15 R16 R17 R18: library part R0201, "270R 0603"
R19 R20 R21 R22: library part R0201, "2k2 0603"
R23 R24 R25 R40 R41 R42 R43 R48 R49 R50 R51: library part R0201, "10k 0603"
R26 R27 R28: library part R0201, "51k 0603"
R29 R30 R31: library part R0201, "200k 0603"
R32: library part R0201, "68k 0603"
R33 R35 R37: library part R0201, "30k 0603"
R34 R36 R38: library part R0201, "100k 0603"
R39: library part R0201, "150k 0603"
R44 R45 R46 R47: library part R0201, "22k 0603"
R52 R53 R54 R55: library part R0201, "100R 0603"
R56 R57: library part R0201, "1M 0603"
R58: library part R0201, "10R 0805"
R59: library part R0201, "1k5 0402"
R60: library part RES, "4k7 0402"
T1 T2 T3: library part DLW43SH101XK2L
TP1 TP2 TP3 TP4: library part TP_Dup1
U1: library part LM27313XMFX, "TPS54302DDCR"
U2 U3 U4 U5 U16: library part ADA4891-1ARJZ-R7, "ADA4891-1ARJZ-R7"
U19: library part LTC2875

## Free pads (board coordinates)
  oval 5x4.7 hole 2.5: M(8,17)
  round 5 hole 2.5: M(15.5,-6)
  oval 5.7x4.7 hole 3: M(92.5,-17) M(92.5,17)

## Via types
v1: diameter 0.6, hole 0.3, Top Layer to Bottom Layer, tented both sides, 81 vias
v2: diameter 0.45, hole 0.2, Top Layer to Bottom Layer, tented both sides, 69 vias

## Nets (pads, with @x,y where several pads share a name; then routed paths per layer and width w, separated by ;. In a path a pad name is that pad's centre, name@x,y a point inside that pad or via, vN(x,y) a via of type N, cw(c..) or ccw(c..) an arc to the next point about the centre after c; other vN are vias at no path point)
3V3: C76.2 C78.2 C91.2 C92.2 C94.2 C95.2 C96.2 C97.2 C100.2 L16.2 L21.1 R59.1 R60.1 U10.1 U17.6 U17.11 U17.28 U17.50 U17.75 U17.100 U19.5 | length 26
  Top Layer w0.25: v2(65.265,-16.242) C96.2@65.9,-16.242 cw(c66.504,-16.846) 66.504,-15.992 U17.50@67.7,-15.992 ; v2(65.265,-5.242) C97.2@65.9,-5.242 cw(c66.504,-5.846) 66.504,-4.992 U17.28@67.7,-4.992 ; R60.1@76.058,0.669 v2(76.058,0.034) C94.2@76.058,-0.601 cw(c75.454,-1.204) 76.308,-1.204 U17.11@76.308,-2.4 ; v2(78.8,-3.735) U17.6@78.8,-2.4 ; U17.75@81.3,-17.9 C95.2@82.042,-17.9 v2(82.677,-17.9) ; U17.100@82.9,-4.008 84.096,-4.008 ccw(c84.096,-3.154) C92.2@84.7,-3.758 v2(85.335,-3.758) ; v2(87.6,-11.087) R59.1@87.6,-10.452 ; U19.5@88.075,-3.758 C91.2@89.3,-3.758 v2(89.935,-3.758)
  Top Layer w0.4: C100.2@68.811,1.6 L21.1@68.811,2.6
  Top Layer w0.5: v1(68.811,0.7) C100.2@68.811,1.6
  Top Layer w0.6: U10.1@88.428,8.7 v1(88.428,10) ; C78.2@92.5,4.6 v1(93.8,4.6)
  Top Layer w0.8: L16.2@88.428,1.7 C76.2@90.3,4.6 C78.2@92.5,4.6
3V3_REF: C98.2 R56.2 U17.21 U18.2 | length 22.4
  Top Layer w0.3: C98.2@71.1,0 cw(c70.617,-0.483) 71.3,-0.483 U17.21@71.3,-2.4
  Top Layer w0.5: R56.2@69.712,16.7 v1(70.612,16.7) ; C98.2@71.1,0 U18.2@71.1,1.3 v1(72,1.3)
  Bottom Layer w0.5: v1(70.612,16.7) 70.612,7.086 cw(c68.987,7.086) 70.136,5.936 69.724,5.524 ccw(c70.749,4.5) 69.3,4.5 ccw(c70.507,4.5) 69.654,3.646 v1(72,1.3)
5V: C2.2 C3.2 C11.2 C16.2 C60.2 C90.2 C93.2 J3.4 J6.1 L1.1 L2.2 L15.1 R12.1 U10.2 U10.3 U18.1 U19.3 | length 37.7
  Top Layer w0.2: U19.3@87.425,-6.558 87.425,-7.136 ccw(c88.022,-7.136) C90.2@87.6,-7.558
  Top Layer w0.35: v2(87.6,-8.093) C90.2@87.6,-7.558
  Top Layer w0.4: v2(88.712,-10.8) J6.1@90.048,-10.8
  Top Layer w0.5: v1(70.2,4.6) C93.2@71.1,4.6 U18.1@71.1,3.2 ; C60.2@84.7,8.7 U10.3@86.528,8.7 U10.2@87.478,8.7
  Top Layer w0.6: v1(18.793,-9.528) C3.2@20.193,-9.528 C2.2@22.652,-9.528 26.16,-9.528 cw(c26.16,-12.068) 28.7,-12.068 L1.1@28.7,-15.5 ; L2.2@74.6,12.474 ccw(c74.6,13.98) 75.665,12.915 77.074,14.324 cw(c78.224,13.174) 78.224,14.8 78.6,14.8 cw(c78.6,14.2) C11.2@79.2,14.2 C16.2@79.2,12 ; L15.1@76.1,10.1 cw(c76.583,9.617) 76.583,10.3 R12.1@78.4,10.3 78.4,10.527 cw(c80.026,10.527) 78.876,11.676 C16.2@79.2,12 ; v1(80.5,12) C16.2@79.2,12 ; C60.2@84.7,8.7 v1(84.7,10)
24V: C1.2 D1.2 J1.1 U1.3 | length 11.6
  Top Layer w0.5: U1.3@82.25,16.25 cw(c82.9,16.25) 82.9,16.9 C1.2@84,16.9 85.377,16.9 ccw(c85.377,18.526) D1.2@86.526,17.376
  Top Layer w0.8: D1.2@87.937,17.513 cw(c87.635,17.212) 88.062,17.212 ccw(c89.687,17.212) 88.538,16.062 91.356,13.244 ccw(c92.5,14.387) J1.1@92.5,12.77
AGND: C93.1 C98.1 C99.1 L22.2 U17.19 U17.20 U18.3 | length 16.8
  Top Layer w0.3: C99.1@67.211,4.6 68.035,5.424 cw(c69.184,4.274) 69.184,5.9 71.4,5.9 cw(c71.4,4.6) C93.1@72.7,4.6 ; U17.20@71.8,-2.4 71.8,-1.3 cw(c72.134,-1.3) 72.134,-0.966 72.3,-0.966 ; U17.19@72.3,-2.4 72.3,-0.966 ; C98.1@72.7,0 ccw(c73.666,-0.966) 72.3,-0.966
  Top Layer w0.4: L22.2@67.211,3.6 C99.1@67.211,4.6
  Top Layer w0.5: C98.1@72.7,0 ccw(c72.152,0.548) 72.927,0.548 72.927,1.833 cw(c73.517,1.833) U18.3@73.1,2.25 73.1,3.635 ccw(c71.735,3.635) C93.1@72.7,4.6
CAN_H: J2.1 U19.7 | length 8.7
  Top Layer w0.25: U19.7@86.775,-3.758 86.775,-2.618 cw(c88.592,-2.618) 88.592,-0.8 89.757,-0.8 ccw(c89.757,0.826) 90.906,-0.324 J2.1@92.5,1.27
CAN_L: J2.2 U19.6 | length 7
  Top Layer w0.25: U19.6@87.425,-3.758 87.425,-2.562 cw(c88.717,-2.562) 88.717,-1.27 J2.2@92.5,-1.27
CAN_RX: U17.81 U19.4 | length 11.4
  Top Layer w0.25: U17.81@82.9,-13.5 83.966,-13.5 ccw(c83.966,-12.566) 84.9,-12.566 84.9,-9.54 cw(c85.74,-9.54) 85.74,-8.7 87.5,-8.7 ccw(c87.5,-7.775) 88.425,-7.775 88.425,-7.641 ccw(c87.742,-7.641) 88.225,-7.158 cw(c88.587,-6.796) 88.075,-6.796 U19.4@88.075,-6.558
CAN_TX: U17.82 U19.1 | length 8.4
  Top Layer w0.25: U17.82@82.9,-13 84,-13 ccw(c84,-12.588) 84.412,-12.588 84.412,-9.518 cw(c86.338,-9.518) 84.976,-8.156 85.975,-7.158 ccw(c85.612,-6.796) 86.125,-6.796 U19.1@86.125,-6.558
CH_0: C85.1 L17.2 U17.23 | length 20.8
  Top Layer w0.2: v1(65.512,5.75) 65.512,0.913 ccw(c67.126,0.913) 67.126,-0.7 69.597,-0.7 cw(c69.597,-1.403) 70.3,-1.403 U17.23@70.3,-2.4
  Top Layer w0.5: L17.2@63.2,13.017 63.227,12.929 cw(c63.227,10.327) 65.369,11.805 C85.1@65.512,11.85 v1(65.512,10.95)
  Mid Layer 2 w0.5: v1(65.512,5.75) v1(65.512,10.95)
CH_1: C86.1 L18.2 U17.24 | length 12.8
  Top Layer w0.2: C86.1@63.8,4.85 64.333,4.85 cw(c64.333,4.583) 64.6,4.583 64.6,1.457 ccw(c67.157,1.457) 67.157,-1.1 69.498,-1.1 cw(c69.498,-1.402) 69.8,-1.402 U17.24@69.8,-2.4
  Top Layer w0.5: L18.2@63.8,3.95 C86.1@63.8,4.85
CH_2: C87.1 L19.2 U17.25 | length 8
  Top Layer w0.25: C87.1@63.8,-4.65 63.8,-4.026 cw(c65.426,-4.026) 65.426,-2.4 U17.25@69.3,-2.4
  Top Layer w0.5: L19.2@63.8,-5.55 C87.1@63.8,-4.65
CH_3: C88.1 L20.2 U17.26 | length 14.7
  Top Layer w0.25: C88.1@63.8,-14.15 64.224,-13.726 ccw(c63.074,-12.577) 64.7,-12.577 64.7,-4.1 cw(c65.3,-4.1) 65.3,-3.5 65.9,-3.5 cw(c65.9,-4.257) 66.435,-3.722 66.503,-3.789 ccw(c67.011,-3.281) 67.011,-4 U17.26@67.7,-4
  Top Layer w0.5: L20.2@63.8,-15.05 C88.1@63.8,-14.15
DAC: C7.1 C8.1 C9.1 C10.1 R8.1 R9.1 R10.1 R11.1 U17.29 | length 85.1
  Top Layer w0.25: U17.29@67.7,-5.5 v2(69.035,-5.5)
  Top Layer w0.5: v1(31.1,-17.64) C10.1@32,-17.64 R11.1@33.6,-17.64 ; v1(31.1,-8.14) C9.1@32,-8.14 R10.1@33.6,-8.14 ; v1(31.1,1.36) C8.1@32,1.36 R9.1@33.6,1.36 ; v1(31.1,10.86) C7.1@32,10.86 R8.1@33.6,10.86
  Mid Layer 2 w0.5: v1(31.1,-17.64) 54.609,-17.64 ccw(c54.609,-7.572) 61.728,-14.691 67.703,-8.717 ccw(c64.486,-5.5) v2(69.035,-5.5)
  Bottom Layer w0.5: v1(31.1,-17.64) 31.356,-17.384 ccw(c29.56,-15.588) 32.1,-15.588 32.1,-10.192 ccw(c29.56,-10.192) 31.356,-8.396 v1(31.1,-8.14) 31.356,-7.884 ccw(c29.56,-6.088) 32.1,-6.088 32.1,-0.692 ccw(c29.56,-0.692) 31.356,1.104 v1(31.1,1.36) 31.356,1.616 ccw(c29.56,3.412) 32.1,3.412 32.1,8.808 ccw(c29.56,8.808) 31.356,10.604 v1(31.1,10.86)
DM: J6.2 U17.70 | length 15
  Top Layer w0.25: U17.70@78.8,-17.6 v2(78.8,-16.265)
  Top Layer w0.3: v2(88.312,-10.15) J6.2@90.048,-10.15
  Bottom Layer w0.2: v2(78.8,-16.265) 79.24,-16.265 ccw(c79.24,-15.64) 79.682,-16.082 85.138,-10.626 cw(c86.287,-11.776) 86.287,-10.15 v2(88.312,-10.15)
DP: J6.3 R59.2 U17.71 | length 16.2
  Top Layer w0.25: U17.71@79.3,-17.6 v2(79.3,-15.765)
  Top Layer w0.4: R59.2@87.6,-9.5 v2(88.712,-9.5) J6.3@90.048,-9.5
  Bottom Layer w0.2: v2(79.3,-15.765) 84.86,-10.205 85.089,-9.976 cw(c86.238,-11.126) 86.238,-9.5 v2(88.712,-9.5)
G_CS: U6.6 U7.6 U8.6 U9.6 U12.6 U13.6 U14.6 U15.6 U17.33 | length 77
  Top Layer w0.25: v2(65.865,-7.5) U17.33@67.7,-7.5
  Top Layer w0.3: v2(55.1,-12.675) U9.6@55.1,-11.775 ; v2(55.1,-3.175) U8.6@55.1,-2.275 ; v2(55.1,6.325) U7.6@55.1,7.225 ; v2(55.1,15.825) U6.6@55.1,16.725 ; v2(59.8,-12.675) U15.6@59.8,-11.775 ; v2(59.8,-3.175) U14.6@59.8,-2.275 ; v2(59.8,6.325) U13.6@59.8,7.225 ; v2(59.8,15.825) U12.6@59.8,16.725
  Mid Layer 2 w0.2: v2(55.1,-3.175) 56.23,-3.175 cw(c56.23,-3.845) 56.704,-3.371 57.601,-4.268 ccw(c58.38,-3.488) 58.38,-4.591 59.568,-4.591 ; v2(55.1,6.325) 56.23,6.325 cw(c56.23,5.655) 56.704,6.129 57.601,5.232 ccw(c58.38,6.012) 58.38,4.909 59.568,4.909 ; v2(55.1,15.825) 56.23,15.825 cw(c56.23,15.155) 56.704,15.629 57.601,14.732 ccw(c58.38,15.512) 58.38,14.409 59.568,14.409 ; v2(59.8,15.825) 59.8,14.971 cw(c59.006,14.971) 59.568,14.409 ; v2(65.865,-7.5) 65.865,-8.362 cw(c64.239,-8.362) 65.389,-9.511 62.701,-12.199 cw(c61.552,-11.049) 61.552,-12.675 v2(59.8,-12.675) cw(c60.361,-12.114) 59.568,-12.114 59.568,-4.591 ; 59.568,-4.591 ccw(c59.006,-4.029) 59.8,-4.029 v2(59.8,-3.175) cw(c60.361,-2.614) 59.568,-2.614 59.568,4.909 ; 59.568,4.909 ccw(c59.006,5.471) 59.8,5.471 v2(59.8,6.325) cw(c60.361,6.886) 59.568,6.886 59.568,14.409
  Bottom Layer w0.2: v2(55.1,-12.675) cw(c56.73,-14.305) 56.73,-12 58.17,-12 cw(c58.17,-14.305) v2(59.8,-12.675) ; v2(55.1,6.325) cw(c56.73,4.695) 56.73,7 58.17,7 cw(c58.17,4.695) v2(59.8,6.325) ; v2(55.1,15.825) cw(c56.73,14.195) 56.73,16.5 58.17,16.5 cw(c58.17,14.195) v2(59.8,15.825)
G_SCK: U6.9 U7.9 U8.9 U9.9 U12.9 U13.9 U14.9 U15.9 U17.30 | length 78.2
  Top Layer w0.2: v2(53.1,-13.175) ccw(c51.893,-11.968) 53.6,-11.968 U9.9@53.6,-11.775 ; v2(53.1,-3.675) ccw(c51.893,-2.468) 53.6,-2.468 U8.9@53.6,-2.275 ; v2(53.1,5.825) ccw(c51.893,7.032) 53.6,7.032 U7.9@53.6,7.225 ; v2(53.1,15.325) ccw(c51.893,16.532) 53.6,16.532 U6.9@53.6,16.725 ; v2(58.3,-13.175) U15.9@58.3,-11.775 ; v2(58.3,-3.675) U14.9@58.3,-2.275 58.3,-1.801 cw(c58.8,-1.801) 58.8,-1.301 65.216,-1.301 cw(c65.216,-2.927) v2(66.365,-1.777) ; v2(58.3,5.825) U13.9@58.3,7.225 ; v2(58.3,15.325) U12.9@58.3,16.725
  Top Layer w0.25: v2(66.365,-6) U17.30@67.7,-6
  Mid Layer 2 w0.2: v2@53.1,-13.159 53.1,-11.8 ; v2(58.3,-13.175) 57.669,-12.544 ccw(c55.873,-14.34) 55.873,-11.8 53.1,-11.8 ; v2(58.3,-3.675) 57.669,-3.044 ccw(c55.873,-4.84) 55.873,-2.3 53.1,-2.3 ; v2(58.3,5.825) 57.669,6.456 ccw(c55.873,4.66) 55.873,7.2 53.1,7.2 ; v2(58.3,15.325) 57.669,15.956 ccw(c55.873,14.16) 55.873,16.7 54.475,16.7 ccw(c54.475,15.325) v2(53.1,15.325) 53.1,7.2 ; 53.1,-11.8 v2(53.1,-3.675) 53.1,-2.3 ; 53.1,-2.3 v2(53.1,5.825) 53.1,7.2
  Mid Layer 2 w0.25: v2(66.365,-6) v2(66.365,-1.777)
G_SI: U9.7 U17.32 | length 18.8
  Top Layer w0.2: v2(54.6,-13.175) U9.7@54.6,-11.775
  Top Layer w0.25: v2(66.365,-7) U17.32@67.7,-7
  Mid Layer 2 w0.2: v2(54.6,-13.175) 55.049,-13.624 ccw(c56.198,-12.474) 56.198,-14.1 60.627,-14.1 ccw(c60.627,-12.474) 61.776,-13.624 65.889,-9.511 ccw(c64.739,-8.362) 66.365,-8.362 v2(66.365,-7)
G_SO: U12.8 U17.31 | length 29
  Top Layer w0.25: v2(65.865,-6.5) U17.31@67.7,-6.5
  Top Layer w0.3: v2(58.8,15.825) U12.8@58.8,16.725
  Mid Layer 2 w0.2: v2(58.8,15.825) 59.04,16.065 cw(c59.741,15.363) 59.741,16.355 59.845,16.355 cw(c59.845,15.9) 60.3,15.9 60.3,12.654 ccw(c61.878,12.654) 60.762,11.538 61.174,11.126 cw(c60.39,10.343) 61.498,10.343 61.498,6.828 ccw(c62.528,6.828) 61.8,6.1 cw(c61.076,5.376) 62.1,5.376 62.1,-0.951 ccw(c66.406,-0.951) 63.361,-3.996 v2(65.865,-6.5)